# Altium PCB ScreenBoard.PcbDoc (part 2 of 2)
Units mm, origin at the board's own origin, x right, y up, seen from the top; angles counter-clockwise.
Board outline 100 x 71.63 mm, 2 copper layers (Top Layer, Bottom Layer); 43 components, 41 nets, 216 pads, 1776 vias.
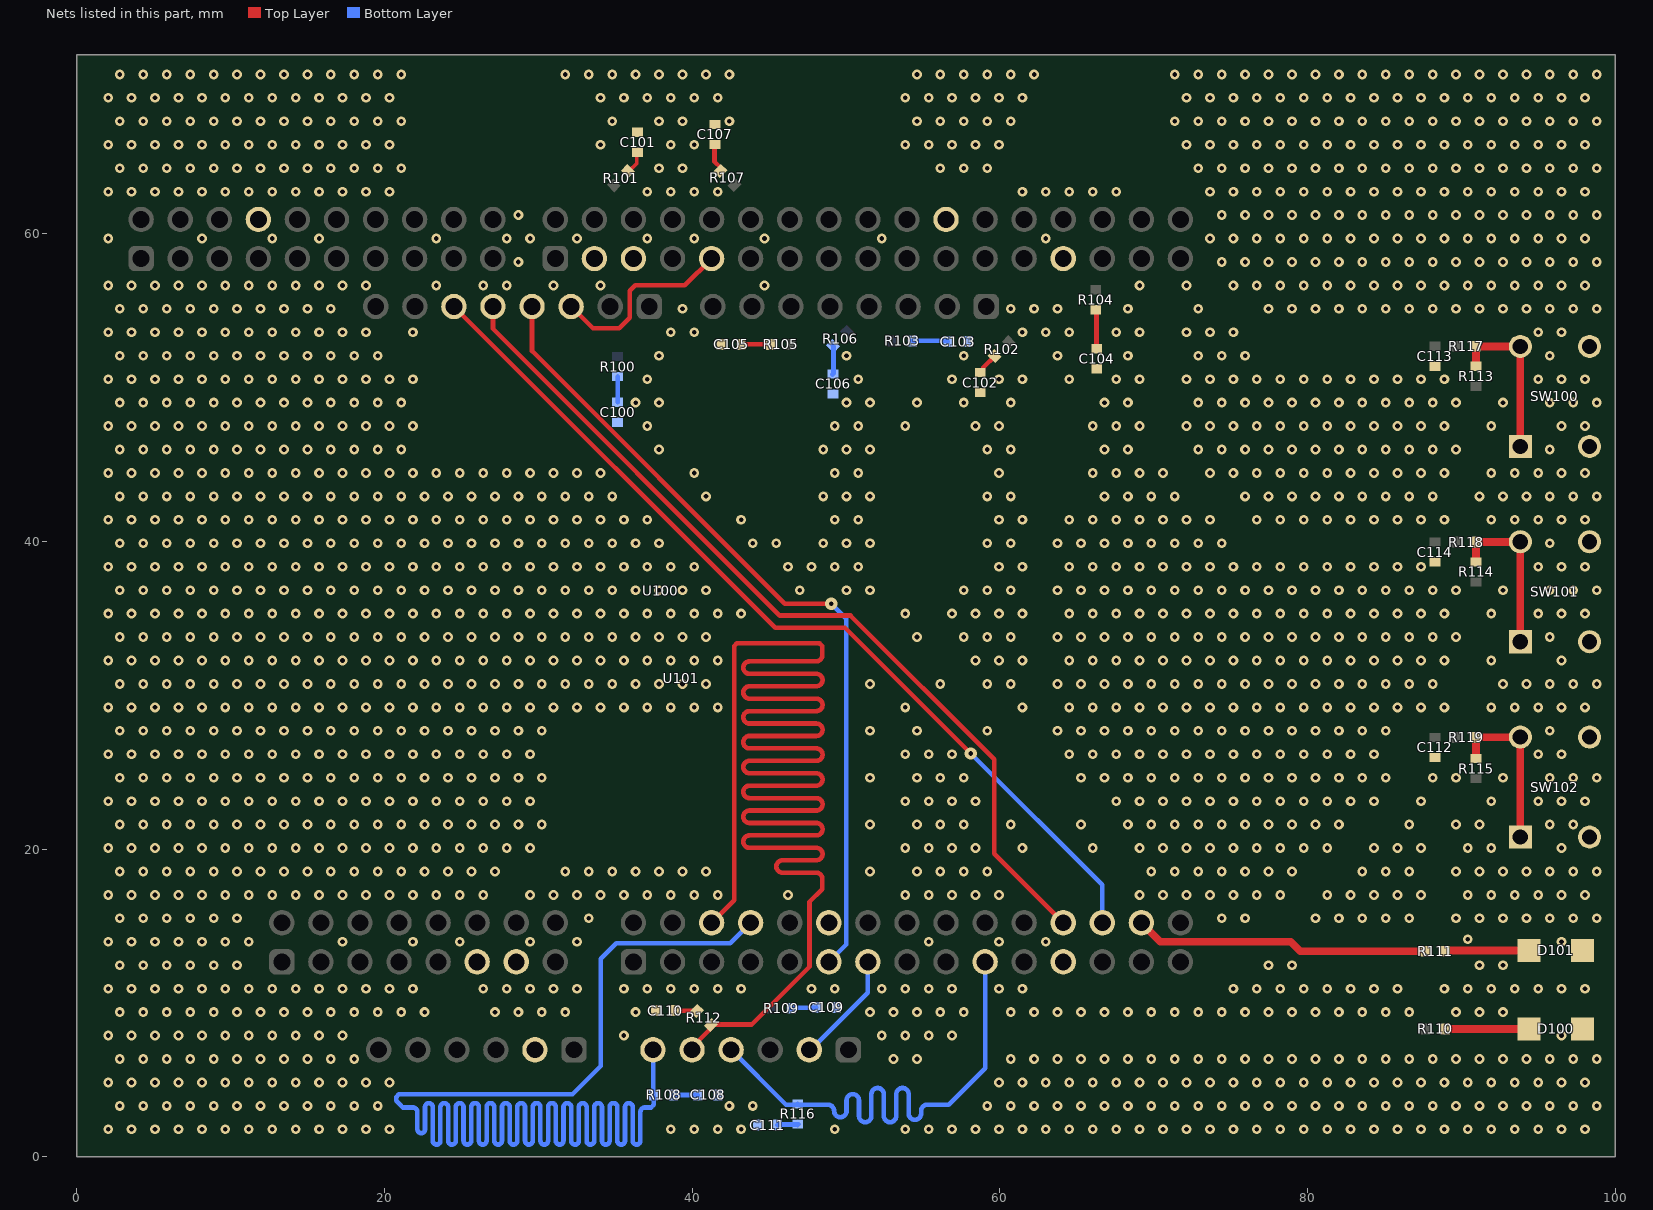
[diagram p2: the nets of this part, all layers, seen from the top]

## Via types
v1: diameter 0.635, hole 0.305, Top Layer to Bottom Layer, tented both sides, 1773 vias
v2: diameter 0.804, hole 0.3, Top Layer to Bottom Layer, tented both sides, 2 vias
v3: diameter 1.3, hole 0.6, Top Layer to Bottom Layer, tented both sides, 1 vias

## Nets (pads, with @x,y where several pads share a name; then routed paths per layer and width w, separated by ;. In a path a pad name is that pad's centre, name@x,y a point inside that pad or via, vN(x,y) a via of type N, cw(c..) or ccw(c..) an arc to the next point about the centre after c; other vN are vias at no path point) (continued)
GND: C100.2 C101.2 C102.2 C103.2 C104.2 C105.2 C106.2 C107.2 C108.2 C109.2 C110.2 C111.2 C112.2 C113.2 C114.2 D100.1 D101.1 SW100.3 SW100.4 SW101.3 SW101.4 SW102.3 SW102.4 U100.11 U100.13 U100.28 U100.39 U100.54 U100.69 U100.71 U100.88 U100.93 U101.8
  other v1: 2.032,1.778 3.556,1.778 5.08,1.778 6.604,1.778 8.128,1.778 9.652,1.778 11.176,1.778 12.7,1.778 14.224,1.778 15.748,1.778 17.272,1.778 18.796,1.778 20.32,1.778 38.608,1.778 40.132,1.778 41.656,1.778 43.18,1.778 49.276,1.778 53.848,1.778 55.372,1.778 56.896,1.778 58.42,1.778 59.944,1.778 61.468,1.778 62.992,1.778 64.516,1.778 66.04,1.778 67.564,1.778 69.088,1.778 70.612,1.778 72.136,1.778 73.66,1.778 75.184,1.778 76.708,1.778 78.232,1.778 79.756,1.778 81.28,1.778 82.804,1.778 84.328,1.778 85.852,1.778 87.376,1.778 88.9,1.778 90.424,1.778 91.948,1.778 93.472,1.778 94.996,1.778 96.52,1.778 98.044,1.778 2.794,3.302 4.318,3.302 5.842,3.302 7.366,3.302 8.89,3.302 10.414,3.302 11.938,3.302 13.462,3.302 14.986,3.302 16.51,3.302 18.034,3.302 19.558,3.302 42.418,3.302 43.942,3.302 59.182,3.302 60.706,3.302 62.23,3.302 63.754,3.302 65.278,3.302 66.802,3.302 68.326,3.302 69.85,3.302 71.374,3.302 72.898,3.302 74.422,3.302 75.946,3.302 77.47,3.302 78.994,3.302 80.518,3.302 82.042,3.302 83.566,3.302 85.09,3.302 86.614,3.302 88.138,3.302 89.662,3.302 91.186,3.302 92.71,3.302 94.234,3.302 95.758,3.302 97.282,3.302 98.806,3.302 2.032,4.826 3.556,4.826 5.08,4.826 6.604,4.826 8.128,4.826 9.652,4.826 11.176,4.826 12.7,4.826 14.224,4.826 15.748,4.826 17.272,4.826 18.796,4.826 20.32,4.826 59.944,4.826 61.468,4.826 62.992,4.826 64.516,4.826 66.04,4.826 67.564,4.826 69.088,4.826 70.612,4.826 72.136,4.826 73.66,4.826 75.184,4.826 76.708,4.826 78.232,4.826 79.756,4.826 81.28,4.826 82.804,4.826 84.328,4.826 85.852,4.826 87.376,4.826 88.9,4.826 90.424,4.826 91.948,4.826 93.472,4.826 94.996,4.826 96.52,4.826 98.044,4.826 2.794,6.35 4.318,6.35 5.842,6.35 7.366,6.35 8.89,6.35 10.414,6.35 11.938,6.35 13.462,6.35 14.986,6.35 16.51,6.35 18.034,6.35 53.086,6.35 54.61,6.35 60.706,6.35 62.23,6.35 63.754,6.35 65.278,6.35 66.802,6.35 68.326,6.35 69.85,6.35 71.374,6.35 72.898,6.35 74.422,6.35 75.946,6.35 77.47,6.35 78.994,6.35 80.518,6.35 82.042,6.35 83.566,6.35 85.09,6.35 86.614,6.35 88.138,6.35 89.662,6.35 91.186,6.35 92.71,6.35 94.234,6.35 95.758,6.35 97.282,6.35 98.806,6.35 2.032,7.874 3.556,7.874 5.08,7.874 6.604,7.874 8.128,7.874 9.652,7.874 11.176,7.874 12.7,7.874 14.224,7.874 15.748,7.874 17.272,7.874 35.56,7.874 52.324,7.874 53.848,7.874 55.372,7.874 56.896,7.874 96.52,7.874 2.794,9.398 4.318,9.398 5.842,9.398 7.366,9.398 8.89,9.398 10.414,9.398 11.938,9.398 13.462,9.398 14.986,9.398 16.51,9.398 18.034,9.398 19.558,9.398 21.082,9.398 22.606,9.398 27.178,9.398 28.702,9.398 30.226,9.398 31.75,9.398 36.322,9.398 51.562,9.398 53.086,9.398 54.61,9.398 56.134,9.398 57.658,9.398 60.706,9.398 62.23,9.398 63.754,9.398 65.278,9.398 66.802,9.398 68.326,9.398 69.85,9.398 71.374,9.398 72.898,9.398 74.422,9.398 75.946,9.398 77.47,9.398 78.994,9.398 80.518,9.398 82.042,9.398 83.566,9.398 85.09,9.398 86.614,9.398 89.662,9.398 91.186,9.398 92.71,9.398 2.032,10.922 3.556,10.922 5.08,10.922 6.604,10.922 8.128,10.922 9.652,10.922 11.176,10.922 12.7,10.922 14.224,10.922 15.748,10.922 17.272,10.922 18.796,10.922 20.32,10.922 21.844,10.922 26.416,10.922 27.94,10.922 29.464,10.922 30.988,10.922 32.512,10.922 35.56,10.922 37.084,10.922 38.608,10.922 40.132,10.922 41.656,10.922 43.18,10.922 47.752,10.922 49.276,10.922 52.324,10.922 53.848,10.922 55.372,10.922 56.896,10.922 59.944,10.922 61.468,10.922 75.184,10.922 76.708,10.922 78.232,10.922 79.756,10.922 81.28,10.922 82.804,10.922 84.328,10.922 85.852,10.922 88.9,10.922 90.424,10.922 91.948,10.922 93.472,10.922 94.996,10.922 96.52,10.922 98.044,10.922 2.794,12.446 4.318,12.446 5.842,12.446 7.366,12.446 8.89,12.446 10.414,12.446 77.47,12.446 78.994,12.446 91.186,12.446 92.71,12.446 2.032,13.97 3.556,13.97 5.08,13.97 6.604,13.97 8.128,13.97 9.652,13.97 11.176,13.97 17.272,13.97 21.844,13.97 24.892,13.97 29.464,13.97 32.512,13.97 55.372,13.97 59.944,13.97 62.992,13.97 96.52,13.97 90.424,14.135 2.794,15.494 4.318,15.494 5.842,15.494 7.366,15.494 8.89,15.494 10.414,15.494 33.274,15.494 74.422,15.494 75.946,15.494 80.518,15.494 82.042,15.494 83.566,15.494 85.09,15.494 86.614,15.494 89.662,15.494 91.186,15.494 92.71,15.494 94.234,15.494 95.758,15.494 97.282,15.494 98.806,15.494 2.032,17.018 3.556,17.018 5.08,17.018 6.604,17.018 8.128,17.018 9.652,17.018 11.176,17.018 12.7,17.018 14.224,17.018 15.748,17.018 17.272,17.018 18.796,17.018 20.32,17.018 21.844,17.018 23.368,17.018 24.892,17.018 26.416,17.018 29.464,17.018 30.988,17.018 32.512,17.018 34.036,17.018 35.56,17.018 37.084,17.018 38.608,17.018 40.132,17.018 41.656,17.018 46.228,17.018 53.848,17.018 55.372,17.018 56.896,17.018 58.42,17.018 59.944,17.018 69.088,17.018 70.612,17.018 72.136,17.018 73.66,17.018 75.184,17.018 76.708,17.018 78.232,17.018 81.28,17.018 82.804,17.018 84.328,17.018 85.852,17.018 87.376,17.018 90.424,17.018 91.948,17.018 93.472,17.018 94.996,17.018 96.52,17.018 98.044,17.018 2.794,18.542 4.318,18.542 5.842,18.542 7.366,18.542 8.89,18.542 10.414,18.542 11.938,18.542 13.462,18.542 14.986,18.542 16.51,18.542 18.034,18.542 19.558,18.542 21.082,18.542 22.606,18.542 24.13,18.542 25.654,18.542 27.178,18.542 31.75,18.542 33.274,18.542 34.798,18.542 36.322,18.542 37.846,18.542 39.37,18.542 40.894,18.542 51.562,18.542 54.61,18.542 56.134,18.542 57.658,18.542 59.182,18.542 69.85,18.542 71.374,18.542 72.898,18.542 74.422,18.542 75.946,18.542 77.47,18.542 78.994,18.542 83.566,18.542 85.09,18.542 86.614,18.542 89.662,18.542 91.186,18.542 92.71,18.542 94.234,18.542 95.758,18.542 97.282,18.542 98.806,18.542 2.032,20.066 3.556,20.066 5.08,20.066 6.604,20.066 8.128,20.066 9.652,20.066 11.176,20.066 12.7,20.066 14.224,20.066 15.748,20.066 17.272,20.066 18.796,20.066 20.32,20.066 21.844,20.066 23.368,20.066 24.892,20.066 26.416,20.066 27.94,20.066 29.464,20.066 53.848,20.066 55.372,20.066 56.896,20.066 58.42,20.066 61.468,20.066 66.04,20.066 69.088,20.066 70.612,20.066 72.136,20.066 73.66,20.066 75.184,20.066 76.708,20.066 78.232,20.066 79.756,20.066 81.28,20.066 84.328,20.066 85.852,20.066 87.376,20.066 90.424,20.066 91.948,20.066 96.52,20.066 2.794,21.59 4.318,21.59 5.842,21.59 7.366,21.59 8.89,21.59 10.414,21.59 11.938,21.59 13.462,21.59 14.986,21.59 16.51,21.59 18.034,21.59 19.558,21.59 21.082,21.59 22.606,21.59 24.13,21.59 25.654,21.59 27.178,21.59 28.702,21.59 30.226,21.59 51.562,21.59 54.61,21.59 56.134,21.59 57.658,21.59 60.706,21.59 65.278,21.59 68.326,21.59 69.85,21.59 71.374,21.59 72.898,21.59 74.422,21.59 75.946,21.59 77.47,21.59 78.994,21.59 80.518,21.59 82.042,21.59 86.614,21.59 89.662,21.59 91.186,21.59 95.758,21.59 97.282,21.59 2.032,23.114 3.556,23.114 5.08,23.114 6.604,23.114 8.128,23.114 9.652,23.114 11.176,23.114 12.7,23.114 14.224,23.114 15.748,23.114 17.272,23.114 18.796,23.114 20.32,23.114 21.844,23.114 23.368,23.114 24.892,23.114 26.416,23.114 27.94,23.114 29.464,23.114 53.848,23.114 55.372,23.114 56.896,23.114 58.42,23.114 67.564,23.114 69.088,23.114 70.612,23.114 72.136,23.114 73.66,23.114 75.184,23.114 76.708,23.114 78.232,23.114 79.756,23.114 81.28,23.114 82.804,23.114 84.328,23.114 87.376,23.114 91.948,23.114 94.996,23.114 96.52,23.114 98.044,23.114 2.794,24.638 4.318,24.638 5.842,24.638 7.366,24.638 8.89,24.638 10.414,24.638 11.938,24.638 13.462,24.638 14.986,24.638 16.51,24.638 18.034,24.638 19.558,24.638 21.082,24.638 22.606,24.638 24.13,24.638 25.654,24.638 27.178,24.638 28.702,24.638 30.226,24.638 51.562,24.638 54.61,24.638 56.134,24.638 57.658,24.638 65.278,24.638 66.802,24.638 68.326,24.638 69.85,24.638 71.374,24.638 72.898,24.638 74.422,24.638 75.946,24.638 77.47,24.638 78.994,24.638 80.518,24.638 82.042,24.638 83.566,24.638 85.09,24.638 88.138,24.638 89.662,24.638 92.71,24.638 95.758,24.638 97.282,24.638 98.806,24.638 2.032,26.162 3.556,26.162 5.08,26.162 6.604,26.162 8.128,26.162 9.652,26.162 11.176,26.162 12.7,26.162 14.224,26.162 15.748,26.162 17.272,26.162 18.796,26.162 20.32,26.162 21.844,26.162 23.368,26.162 24.892,26.162 26.416,26.162 27.94,26.162 29.464,26.162 53.848,26.162 55.372,26.162 56.896,26.162 64.516,26.162 66.04,26.162 67.564,26.162 69.088,26.162 70.612,26.162 72.136,26.162 73.66,26.162 75.184,26.162 76.708,26.162 78.232,26.162 79.756,26.162 81.28,26.162 82.804,26.162 84.328,26.162 94.996,26.162 96.52,26.162 2.794,27.686 4.318,27.686 5.842,27.686 7.366,27.686 8.89,27.686 10.414,27.686 11.938,27.686 13.462,27.686 14.986,27.686 16.51,27.686 18.034,27.686 19.558,27.686 21.082,27.686 22.606,27.686 24.13,27.686 25.654,27.686 27.178,27.686 28.702,27.686 30.226,27.686 51.562,27.686 54.61,27.686 59.182,27.686 63.754,27.686 65.278,27.686 66.802,27.686 68.326,27.686 69.85,27.686 71.374,27.686 72.898,27.686 74.422,27.686 75.946,27.686 77.47,27.686 78.994,27.686 80.518,27.686 82.042,27.686 83.566,27.686 85.09,27.686 95.758,27.686 2.032,29.21 3.556,29.21 5.08,29.21 6.604,29.21 8.128,29.21 9.652,29.21 11.176,29.21 12.7,29.21 14.224,29.21 15.748,29.21 17.272,29.21 18.796,29.21 20.32,29.21 21.844,29.21 23.368,29.21 24.892,29.21 26.416,29.21 27.94,29.21 29.464,29.21 30.988,29.21 32.512,29.21 34.036,29.21 35.56,29.21 37.084,29.21 38.608,29.21 40.132,29.21 41.656,29.21 53.848,29.21 61.468,29.21 64.516,29.21 66.04,29.21 67.564,29.21 69.088,29.21 70.612,29.21 72.136,29.21 73.66,29.21 75.184,29.21 76.708,29.21 78.232,29.21 79.756,29.21 81.28,29.21 82.804,29.21 84.328,29.21 85.852,29.21 87.376,29.21 88.9,29.21 91.948,29.21 93.472,29.21 94.996,29.21 96.52,29.21 98.044,29.21 2.794,30.734 4.318,30.734 5.842,30.734 7.366,30.734 8.89,30.734 10.414,30.734 11.938,30.734 13.462,30.734 14.986,30.734 16.51,30.734 18.034,30.734 19.558,30.734 21.082,30.734 22.606,30.734 24.13,30.734 25.654,30.734 27.178,30.734 28.702,30.734 30.226,30.734 31.75,30.734 33.274,30.734 34.798,30.734 36.322,30.734 37.846,30.734 39.37,30.734 40.894,30.734 51.562,30.734 56.134,30.734 59.182,30.734 60.706,30.734 63.754,30.734 65.278,30.734 66.802,30.734 68.326,30.734 69.85,30.734 71.374,30.734 72.898,30.734 74.422,30.734 75.946,30.734 77.47,30.734 78.994,30.734 80.518,30.734 82.042,30.734 83.566,30.734 85.09,30.734 86.614,30.734 88.138,30.734 92.71,30.734 94.234,30.734 95.758,30.734 97.282,30.734 98.806,30.734 2.032,32.258 3.556,32.258 5.08,32.258 6.604,32.258 8.128,32.258 9.652,32.258 11.176,32.258 12.7,32.258 14.224,32.258 15.748,32.258 17.272,32.258 18.796,32.258 20.32,32.258 21.844,32.258 23.368,32.258 24.892,32.258 26.416,32.258 27.94,32.258 29.464,32.258 30.988,32.258 32.512,32.258 34.036,32.258 35.56,32.258 37.084,32.258 38.608,32.258 40.132,32.258 41.656,32.258 58.42,32.258 59.944,32.258 61.468,32.258 64.516,32.258 66.04,32.258 67.564,32.258 69.088,32.258 70.612,32.258 72.136,32.258 73.66,32.258 75.184,32.258 76.708,32.258 78.232,32.258 79.756,32.258 81.28,32.258 82.804,32.258 84.328,32.258 85.852,32.258 87.376,32.258 88.9,32.258 91.948,32.258 96.52,32.258 2.794,33.782 4.318,33.782 5.842,33.782 7.366,33.782 8.89,33.782 10.414,33.782 11.938,33.782 13.462,33.782 14.986,33.782 16.51,33.782 18.034,33.782 19.558,33.782 21.082,33.782 22.606,33.782 24.13,33.782 25.654,33.782 27.178,33.782 28.702,33.782 30.226,33.782 31.75,33.782 33.274,33.782 34.798,33.782 36.322,33.782 37.846,33.782 39.37,33.782 40.894,33.782 54.61,33.782 57.658,33.782 59.182,33.782 60.706,33.782 63.754,33.782 65.278,33.782 66.802,33.782 68.326,33.782 69.85,33.782 71.374,33.782 72.898,33.782 74.422,33.782 75.946,33.782 77.47,33.782 78.994,33.782 80.518,33.782 82.042,33.782 83.566,33.782 85.09,33.782 86.614,33.782 88.138,33.782 89.662,33.782 95.758,33.782 2.032,35.306 3.556,35.306 5.08,35.306 6.604,35.306 8.128,35.306 9.652,35.306 11.176,35.306 12.7,35.306 14.224,35.306 15.748,35.306 17.272,35.306 18.796,35.306 20.32,35.306 21.844,35.306 23.368,35.306 24.892,35.306 26.416,35.306 27.94,35.306 29.464,35.306 30.988,35.306 32.512,35.306 34.036,35.306 35.56,35.306 37.084,35.306 38.608,35.306 40.132,35.306 41.656,35.306 43.18,35.306 53.848,35.306 56.896,35.306 58.42,35.306 59.944,35.306 61.468,35.306 64.516,35.306 66.04,35.306 67.564,35.306 69.088,35.306 70.612,35.306 72.136,35.306 73.66,35.306 75.184,35.306 76.708,35.306 78.232,35.306 79.756,35.306 81.28,35.306 82.804,35.306 84.328,35.306 85.852,35.306 87.376,35.306 88.9,35.306 91.948,35.306 94.996,35.306 96.52,35.306 98.044,35.306 2.794,36.83 4.318,36.83 5.842,36.83 7.366,36.83 8.89,36.83 10.414,36.83 11.938,36.83 13.462,36.83 14.986,36.83 16.51,36.83 18.034,36.83 19.558,36.83 21.082,36.83 22.606,36.83 24.13,36.83 25.654,36.83 27.178,36.83 28.702,36.83 30.226,36.83 31.75,36.83 33.274,36.83 34.798,36.83 36.322,36.83 37.846,36.83 39.37,36.83 40.894,36.83 46.99,36.83 50.038,36.83 51.562,36.83 57.658,36.83 59.182,36.83 60.706,36.83 63.754,36.83 65.278,36.83 66.802,36.83 68.326,36.83 69.85,36.83 71.374,36.83 72.898,36.83 74.422,36.83 75.946,36.83 77.47,36.83 78.994,36.83 80.518,36.83 82.042,36.83 83.566,36.83 85.09,36.83 86.614,36.83 88.138,36.83 89.662,36.83 92.71,36.83 95.758,36.83 97.282,36.83 98.806,36.83 2.032,38.354 3.556,38.354 5.08,38.354 6.604,38.354 8.128,38.354 9.652,38.354 11.176,38.354 12.7,38.354 14.224,38.354 15.748,38.354 17.272,38.354 18.796,38.354 20.32,38.354 21.844,38.354 23.368,38.354 24.892,38.354 26.416,38.354 27.94,38.354 29.464,38.354 30.988,38.354 32.512,38.354 34.036,38.354 35.56,38.354 37.084,38.354 38.608,38.354 40.132,38.354 46.228,38.354 47.752,38.354 49.276,38.354 50.8,38.354 59.944,38.354 61.468,38.354 64.516,38.354 66.04,38.354 67.564,38.354 69.088,38.354 70.612,38.354 72.136,38.354 73.66,38.354 75.184,38.354 76.708,38.354 78.232,38.354 79.756,38.354 81.28,38.354 82.804,38.354 84.328,38.354 85.852,38.354 87.376,38.354 94.996,38.354 96.52,38.354 98.044,38.354 2.794,39.878 4.318,39.878 5.842,39.878 7.366,39.878 8.89,39.878 10.414,39.878 11.938,39.878 13.462,39.878 14.986,39.878 16.51,39.878 18.034,39.878 19.558,39.878 21.082,39.878 22.606,39.878 24.13,39.878 25.654,39.878 27.178,39.878 28.702,39.878 30.226,39.878 31.75,39.878 33.274,39.878 34.798,39.878 36.322,39.878 37.846,39.878 43.942,39.878 45.466,39.878 48.514,39.878 50.038,39.878 51.562,39.878 59.182,39.878 60.706,39.878 63.754,39.878 65.278,39.878 66.802,39.878 68.326,39.878 69.85,39.878 71.374,39.878 72.898,39.878 74.422,39.878 95.758,39.878 2.032,41.402 3.556,41.402 5.08,41.402 6.604,41.402 8.128,41.402 9.652,41.402 11.176,41.402 12.7,41.402 14.224,41.402 15.748,41.402 17.272,41.402 18.796,41.402 20.32,41.402 21.844,41.402 23.368,41.402 24.892,41.402 26.416,41.402 27.94,41.402 29.464,41.402 30.988,41.402 32.512,41.402 34.036,41.402 35.56,41.402 37.084,41.402 43.18,41.402 49.276,41.402 50.8,41.402 59.944,41.402 61.468,41.402 64.516,41.402 66.04,41.402 67.564,41.402 69.088,41.402 70.612,41.402 72.136,41.402 73.66,41.402 76.708,41.402 78.232,41.402 79.756,41.402 81.28,41.402 82.804,41.402 84.328,41.402 85.852,41.402 87.376,41.402 88.9,41.402 91.948,41.402 93.472,41.402 94.996,41.402 96.52,41.402 98.044,41.402 2.794,42.926 4.318,42.926 5.842,42.926 7.366,42.926 8.89,42.926 10.414,42.926 11.938,42.926 13.462,42.926 14.986,42.926 16.51,42.926 18.034,42.926 19.558,42.926 21.082,42.926 22.606,42.926 24.13,42.926 25.654,42.926 27.178,42.926 28.702,42.926 30.226,42.926 31.75,42.926 33.274,42.926 34.798,42.926 40.894,42.926 48.514,42.926 50.038,42.926 51.562,42.926 59.182,42.926 60.706,42.926 66.802,42.926 68.326,42.926 69.85,42.926 71.374,42.926 75.946,42.926 77.47,42.926 78.994,42.926 80.518,42.926 82.042,42.926 83.566,42.926 85.09,42.926 86.614,42.926 88.138,42.926 91.186,42.926 92.71,42.926 94.234,42.926 95.758,42.926 97.282,42.926 98.806,42.926 2.032,44.45 3.556,44.45 5.08,44.45 6.604,44.45 8.128,44.45 9.652,44.45 11.176,44.45 12.7,44.45 14.224,44.45 15.748,44.45 17.272,44.45 18.796,44.45 20.32,44.45 21.844,44.45 23.368,44.45 24.892,44.45 26.416,44.45 27.94,44.45 29.464,44.45 30.988,44.45 32.512,44.45 34.036,44.45 40.132,44.45 49.276,44.45 50.8,44.45 59.944,44.45 66.04,44.45 67.564,44.45 69.088,44.45 70.612,44.45 73.66,44.45 75.184,44.45 76.708,44.45 78.232,44.45 79.756,44.45 81.28,44.45 82.804,44.45 84.328,44.45 85.852,44.45 87.376,44.45 88.9,44.45 91.948,44.45 93.472,44.45 94.996,44.45 96.52,44.45 98.044,44.45 2.794,45.974 4.318,45.974 5.842,45.974 7.366,45.974 8.89,45.974 10.414,45.974 11.938,45.974 13.462,45.974 14.986,45.974 16.51,45.974 18.034,45.974 19.558,45.974 21.082,45.974 37.846,45.974 48.514,45.974 50.038,45.974 51.562,45.974 59.182,45.974 60.706,45.974 66.802,45.974 68.326,45.974 72.898,45.974 74.422,45.974 75.946,45.974 77.47,45.974 78.994,45.974 80.518,45.974 82.042,45.974 83.566,45.974 85.09,45.974 86.614,45.974 88.138,45.974 89.662,45.974 95.758,45.974 2.032,47.498 3.556,47.498 5.08,47.498 6.604,47.498 8.128,47.498 9.652,47.498 11.176,47.498 12.7,47.498 14.224,47.498 15.748,47.498 17.272,47.498 18.796,47.498 20.32,47.498 21.844,47.498 37.084,47.498 49.276,47.498 50.8,47.498 53.848,47.498 58.42,47.498 59.944,47.498 66.04,47.498 67.564,47.498 69.088,47.498 72.136,47.498 73.66,47.498 75.184,47.498 76.708,47.498 78.232,47.498 79.756,47.498 81.28,47.498 82.804,47.498 84.328,47.498 85.852,47.498 87.376,47.498 88.9,47.498 91.948,47.498 96.52,47.498 98.044,47.498 2.794,49.022 4.318,49.022 5.842,49.022 7.366,49.022 8.89,49.022 10.414,49.022 11.938,49.022 13.462,49.022 14.986,49.022 16.51,49.022 18.034,49.022 19.558,49.022 21.082,49.022 36.322,49.022 37.846,49.022 50.038,49.022 51.562,49.022 54.61,49.022 57.658,49.022 60.706,49.022 66.802,49.022 68.326,49.022 72.898,49.022 74.422,49.022 75.946,49.022 77.47,49.022 78.994,49.022 80.518,49.022 82.042,49.022 83.566,49.022 85.09,49.022 86.614,49.022 88.138,49.022 89.662,49.022 92.71,49.022 95.758,49.022 97.282,49.022 98.806,49.022 2.032,50.546 3.556,50.546 5.08,50.546 6.604,50.546 8.128,50.546 9.652,50.546 11.176,50.546 12.7,50.546 14.224,50.546 15.748,50.546 17.272,50.546 18.796,50.546 20.32,50.546 21.844,50.546 37.084,50.546 50.8,50.546 56.896,50.546 59.944,50.546 61.468,50.546 64.516,50.546 67.564,50.546 69.088,50.546 72.136,50.546 73.66,50.546 75.184,50.546 76.708,50.546 78.232,50.546 79.756,50.546 81.28,50.546 82.804,50.546 84.328,50.546 85.852,50.546 87.376,50.546 88.9,50.546 94.996,50.546 96.52,50.546 98.044,50.546 2.794,52.07 4.318,52.07 5.842,52.07 7.366,52.07 8.89,52.07 10.414,52.07 11.938,52.07 13.462,52.07 14.986,52.07 16.51,52.07 18.034,52.07 19.558,52.07 37.846,52.07 50.038,52.07 57.658,52.07 63.754,52.07 68.326,52.07 72.898,52.07 74.422,52.07 75.946,52.07 95.758,52.07 2.032,53.594 3.556,53.594 5.08,53.594 6.604,53.594 8.128,53.594 9.652,53.594 11.176,53.594 12.7,53.594 14.224,53.594 15.748,53.594 17.272,53.594 18.796,53.594 21.844,53.594 38.608,53.594 40.132,53.594 61.468,53.594 62.992,53.594 64.516,53.594 67.564,53.594 69.088,53.594 72.136,53.594 73.66,53.594 75.184,53.594 94.996,53.594 96.52,53.594 2.794,55.118 4.318,55.118 5.842,55.118 7.366,55.118 8.89,55.118 10.414,55.118 11.938,55.118 13.462,55.118 14.986,55.118 16.51,55.118 39.37,55.118 60.706,55.118 62.23,55.118 63.754,55.118 68.326,55.118 72.898,55.118 77.47,55.118 78.994,55.118 80.518,55.118 82.042,55.118 83.566,55.118 85.09,55.118 86.614,55.118 88.138,55.118 89.662,55.118 91.186,55.118 92.71,55.118 94.234,55.118 95.758,55.118 97.282,55.118 98.806,55.118 2.032,56.642 3.556,56.642 5.08,56.642 6.604,56.642 8.128,56.642 9.652,56.642 11.176,56.642 12.7,56.642 14.224,56.642 15.748,56.642 17.272,56.642 18.796,56.642 23.368,56.642 26.416,56.642 27.94,56.642 30.988,56.642 34.036,56.642 44.704,56.642 69.088,56.642 72.136,56.642 75.184,56.642 76.708,56.642 78.232,56.642 79.756,56.642 81.28,56.642 82.804,56.642 84.328,56.642 85.852,56.642 87.376,56.642 88.9,56.642 90.424,56.642 91.948,56.642 93.472,56.642 94.996,56.642 96.52,56.642 98.044,56.642 28.702,58.166 74.422,58.166 75.946,58.166 77.47,58.166 78.994,58.166 80.518,58.166 82.042,58.166 83.566,58.166 85.09,58.166 86.614,58.166 88.138,58.166 89.662,58.166 91.186,58.166 92.71,58.166 94.234,58.166 95.758,58.166 97.282,58.166 98.806,58.166 2.032,59.69 8.128,59.69 12.7,59.69 15.748,59.69 23.368,59.69 27.94,59.69 29.464,59.69 32.512,59.69 37.084,59.69 40.132,59.69 44.704,59.69 52.324,59.69 62.992,59.69 73.66,59.69 75.184,59.69 76.708,59.69 78.232,59.69 79.756,59.69 81.28,59.69 82.804,59.69 84.328,59.69 85.852,59.69 87.376,59.69 88.9,59.69 90.424,59.69 91.948,59.69 93.472,59.69 94.996,59.69 96.52,59.69 98.044,59.69 28.702,61.214 74.422,61.214 75.946,61.214 77.47,61.214 78.994,61.214 80.518,61.214 82.042,61.214 83.566,61.214 85.09,61.214 86.614,61.214 88.138,61.214 89.662,61.214 91.186,61.214 92.71,61.214 94.234,61.214 95.758,61.214 97.282,61.214 98.806,61.214 2.032,62.738 3.556,62.738 5.08,62.738 6.604,62.738 8.128,62.738 9.652,62.738 11.176,62.738 12.7,62.738 14.224,62.738 15.748,62.738 17.272,62.738 18.796,62.738 20.32,62.738 37.084,62.738 38.608,62.738 40.132,62.738 41.656,62.738 61.468,62.738 62.992,62.738 64.516,62.738 66.04,62.738 67.564,62.738 73.66,62.738 75.184,62.738 76.708,62.738 78.232,62.738 79.756,62.738 81.28,62.738 82.804,62.738 84.328,62.738 85.852,62.738 87.376,62.738 88.9,62.738 90.424,62.738 91.948,62.738 93.472,62.738 94.996,62.738 96.52,62.738 98.044,62.738 2.794,64.262 4.318,64.262 5.842,64.262 7.366,64.262 8.89,64.262 10.414,64.262 11.938,64.262 13.462,64.262 14.986,64.262 16.51,64.262 18.034,64.262 19.558,64.262 21.082,64.262 37.846,64.262 39.37,64.262 56.134,64.262 57.658,64.262 59.182,64.262 72.898,64.262 74.422,64.262 75.946,64.262 77.47,64.262 78.994,64.262 80.518,64.262 82.042,64.262 83.566,64.262 85.09,64.262 86.614,64.262 88.138,64.262 89.662,64.262 91.186,64.262 92.71,64.262 94.234,64.262 95.758,64.262 97.282,64.262 98.806,64.262 2.032,65.786 3.556,65.786 5.08,65.786 6.604,65.786 8.128,65.786 9.652,65.786 11.176,65.786 12.7,65.786 14.224,65.786 15.748,65.786 17.272,65.786 18.796,65.786 20.32,65.786 34.036,65.786 38.608,65.786 40.132,65.786 53.848,65.786 55.372,65.786 56.896,65.786 58.42,65.786 59.944,65.786 72.136,65.786 73.66,65.786 75.184,65.786 76.708,65.786 78.232,65.786 79.756,65.786 81.28,65.786 82.804,65.786 84.328,65.786 85.852,65.786 87.376,65.786 88.9,65.786 90.424,65.786 91.948,65.786 93.472,65.786 94.996,65.786 96.52,65.786 98.044,65.786 2.794,67.31 4.318,67.31 5.842,67.31 7.366,67.31 8.89,67.31 10.414,67.31 11.938,67.31 13.462,67.31 14.986,67.31 16.51,67.31 18.034,67.31 19.558,67.31 21.082,67.31 34.798,67.31 37.846,67.31 39.37,67.31 42.418,67.31 54.61,67.31 56.134,67.31 57.658,67.31 59.182,67.31 60.706,67.31 71.374,67.31 72.898,67.31 74.422,67.31 75.946,67.31 77.47,67.31 78.994,67.31 80.518,67.31 82.042,67.31 83.566,67.31 85.09,67.31 86.614,67.31 88.138,67.31 89.662,67.31 91.186,67.31 92.71,67.31 94.234,67.31 95.758,67.31 97.282,67.31 98.806,67.31 2.032,68.834 3.556,68.834 5.08,68.834 6.604,68.834 8.128,68.834 9.652,68.834 11.176,68.834 12.7,68.834 14.224,68.834 15.748,68.834 17.272,68.834 18.796,68.834 20.32,68.834 34.036,68.834 35.56,68.834 37.084,68.834 38.608,68.834 40.132,68.834 41.656,68.834 53.848,68.834 55.372,68.834 56.896,68.834 58.42,68.834 59.944,68.834 61.468,68.834 72.136,68.834 73.66,68.834 75.184,68.834 76.708,68.834 78.232,68.834 79.756,68.834 81.28,68.834 82.804,68.834 84.328,68.834 85.852,68.834 87.376,68.834 88.9,68.834 90.424,68.834 91.948,68.834 93.472,68.834 94.996,68.834 96.52,68.834 98.044,68.834 2.794,70.358 4.318,70.358 5.842,70.358 7.366,70.358 8.89,70.358 10.414,70.358 11.938,70.358 13.462,70.358 14.986,70.358 16.51,70.358 18.034,70.358 19.558,70.358 21.082,70.358 31.75,70.358 33.274,70.358 34.798,70.358 36.322,70.358 37.846,70.358 39.37,70.358 40.894,70.358 42.418,70.358 54.61,70.358 56.134,70.358 57.658,70.358 59.182,70.358 60.706,70.358 62.23,70.358 71.374,70.358 72.898,70.358 74.422,70.358 75.946,70.358 77.47,70.358 78.994,70.358 80.518,70.358 82.042,70.358 83.566,70.358 85.09,70.358 86.614,70.358 88.138,70.358 89.662,70.358 91.186,70.358 92.71,70.358 94.234,70.358 95.758,70.358 97.282,70.358 98.806,70.358
NetC100_1: C100.1 R100.1 | length 1.7
  Bottom Layer w0.3: C100.1@35.154,49.047 R100.1@35.154,50.719
NetC101_1: C101.1 R101.2 | length 1.5
  Top Layer w0.254: R101.2@35.821,64.069 35.9,64.069 36.398,64.567 36.398,65.253 C101.1@36.449,65.303
NetC102_1: C102.1 R102.1 | length 1.5
  Top Layer w0.3: C102.1@58.725,50.978 58.775,50.978 58.925,51.128 58.925,51.305 R102.1@59.66,52.04
NetC103_1: C103.1 R103.2 | length 2.3
  Bottom Layer w0.3: R103.2@54.31,53.035 56.571,53.035 C103.1@56.616,52.99
NetC104_1: C104.1 R104.1 | length 2.6
  Top Layer w0.3: R104.1@66.243,55.063 66.281,55.025 66.281,52.54 C104.1@66.294,52.527
NetC105_1: C105.1 R105.2 | length 1.9
  Top Layer w0.3: C105.1@43.18,52.807 R105.2@45.11,52.807
NetC106_1: C106.1 R106.1 | length 1.9
  Bottom Layer w0.3: C106.1@49.124,50.851 49.187,50.915 49.187,52.673 R106.1@49.152,52.708
NetC107_1: C107.1 R107.1 | length 1.9
  Top Layer w0.3: C107.1@41.478,65.807 41.453,65.781 41.453,64.694 41.839,64.308 41.839,64.096 R107.1@41.83,64.086
NetC108_1: C108.1 R108.2 | length 1.6
  Bottom Layer w0.3: R108.2@38.79,4.013 C108.1@40.356,4.013
NetC109_1: C109.1 R109.1 | length 1.7
  Bottom Layer w0.3: R109.1@46.436,9.652 46.461,9.677 48.052,9.677 C109.1@48.078,9.703
NetC110_1: C110.1 R112.2 | length 1.4
  Top Layer w0.3: C110.1@38.933,9.479 40.022,9.479 40.057,9.444 40.27,9.444 R112.2@40.305,9.479
NetC111_1: C111.1 R116.1 | length 1.4
  Bottom Layer w0.3: C111.1@45.542,2.057 45.578,2.093 46.827,2.093 46.863,2.057 R116.1@46.914,2.108
NetD100_2: D100.2 R110.1 | length 5.4
  Top Layer w0.508: R110.1@88.95,8.306 D100.2@94.389,8.306
NetD101_2: D101.2 R111.1 | length 5.5
  Top Layer w0.508: R111.1@88.951,13.36 88.951,13.365 88.997,13.411 D101.2@94.389,13.411
NetR113_1: R113.1 R117.1 SW100.1 SW100.2 | length 10.7
  Top Layer w0.508: R113.1@90.957,51.384 90.96,51.386 90.96,52.677 R117.1@90.962,52.68 90.965,52.677 93.835,52.677 SW100.2@93.838,52.674 SW100.1@93.838,46.174
NetR114_1: R114.1 R118.1 SW101.1 SW101.2 | length 10.7
  Top Layer w0.508: R114.1@90.957,38.663 90.96,38.666 90.96,39.952 R118.1@90.962,39.954 90.974,39.966 93.826,39.966 SW101.2@93.838,39.978 SW101.1@93.838,33.478
NetR115_1: R115.1 R119.1 SW102.1 SW102.2 | length 10.8
  Top Layer w0.508: R115.1@90.957,25.883 R119.1@90.957,27.254 R119.1@90.969,27.266 ; R119.1@90.969,27.216 R119.1@90.969,27.266 ; SW102.1@93.838,20.778 SW102.2@93.838,27.278 93.826,27.266 R119.1@90.969,27.266
RD: R108.1 U100.24 U101.6 | length 125
  Bottom Layer w0.3: U101.6@37.45,6.95 37.47,6.93 37.47,4.033 R108.1@37.49,4.013 37.497,4.007 37.497,3.376 37.321,3.2 37.084,3.2 36.934,3.2 ccw(c36.934,2.9) 36.634,2.9 36.634,1.038 cw(c36.384,1.038) 36.134,1.038 36.134,3.232 ccw(c35.884,3.232) 35.634,3.232 35.634,1.038 cw(c35.384,1.038) 35.134,1.038 35.134,3.232 ccw(c34.884,3.232) 34.634,3.232 34.634,1.038 cw(c34.384,1.038) 34.134,1.038 34.134,3.232 ccw(c33.884,3.232) 33.634,3.232 33.634,1.038 cw(c33.384,1.038) 33.134,1.038 33.134,3.232 ccw(c32.884,3.232) 32.634,3.232 32.634,1.038 cw(c32.384,1.038) 32.134,1.038 32.134,3.232 ccw(c31.884,3.232) 31.634,3.232 31.634,1.038 cw(c31.384,1.038) 31.134,1.038 31.134,3.232 ccw(c30.884,3.232) 30.634,3.232 30.634,1.038 cw(c30.384,1.038) 30.134,1.038 30.134,3.232 ccw(c29.884,3.232) 29.634,3.232 29.634,1.038 cw(c29.384,1.038) 29.134,1.038 29.134,3.232 ccw(c28.884,3.232) 28.634,3.232 28.634,1.038 cw(c28.384,1.038) 28.134,1.038 28.134,3.232 ccw(c27.884,3.232) 27.634,3.232 27.634,1.038 cw(c27.384,1.038) 27.134,1.038 27.134,3.232 ccw(c26.884,3.232) 26.634,3.232 26.634,1.038 cw(c26.384,1.038) 26.134,1.038 26.134,3.232 ccw(c25.884,3.232) 25.634,3.232 25.634,1.038 cw(c25.384,1.038) 25.134,1.038 25.134,3.232 ccw(c24.884,3.232) 24.634,3.232 24.634,1.038 cw(c24.384,1.038) 24.134,1.038 24.134,3.232 ccw(c23.884,3.232) 23.634,3.232 23.634,1.038 cw(c23.384,1.038) 23.134,1.038 23.134,3.232 ccw(c22.884,3.232) 22.634,3.232 22.634,1.782 cw(c22.384,1.782) 22.134,1.782 22.134,2.9 ccw(c21.834,2.9) 21.834,3.2 21.184,3.2 20.981,3.403 20.755,3.629 20.755,3.877 20.931,4.053 32.221,4.053 34.061,5.893 34.061,12.878 35.052,13.868 42.462,13.868 U100.24@43.802,15.208
RS: R116.2 U100.35 U101.4 | length 37
  Bottom Layer w0.3: U101.4@42.53,6.95 46.102,3.378 46.812,3.378 R116.2@46.863,3.429 46.914,3.378 48.153,3.378 48.824,3.378 cw(c48.824,2.974) 49.228,2.974 ccw(c49.632,2.974) 50.036,2.974 50.036,3.664 cw(c50.44,3.664) 50.844,3.664 50.844,2.646 ccw(c51.248,2.646) 51.652,2.646 51.652,4.059 cw(c52.056,4.059) 52.46,4.059 52.46,2.646 ccw(c52.864,2.646) 53.268,2.646 53.268,4.059 cw(c53.672,4.059) 54.076,4.059 54.076,2.802 ccw(c54.48,2.802) 54.884,2.802 54.884,2.974 cw(c55.288,2.974) 55.288,3.378 55.438,3.378 56.667,3.378 59.042,5.753 U100.35@59.042,12.668
RST: U100.29 U101.2 | length 7.4
  Bottom Layer w0.3: U101.2@47.61,6.95 47.702,6.95 51.422,10.67 U100.29@51.422,12.668
SCREEN_LED: R111.2 U100.44 | length 19.2
  Top Layer w0.508: U100.44@69.202,15.208 70.433,13.977 78.911,13.977 79.527,13.36 R111.2@87.651,13.36
SD_DI: U100.27 U101.24 | length 53.3
  Top Layer w0.3: U101.24@29.59,55.27 29.59,52.376 46.025,35.941 v2(49.047,35.941)
  Bottom Layer w0.3: U100.27@48.882,12.668 50.009,13.795 50.009,34.98 v2(49.047,35.941)
SD_DO: U100.40 U101.25 | length 58.1
  Top Layer w0.3: U101.25@27.05,55.27 27.05,53.824 45.695,35.179 50.292,35.179 59.639,25.831 59.639,19.691 U100.40@64.122,15.208
SD_SCK: U100.42 U101.26 | length 60.2
  Top Layer w0.3: U101.26@24.51,55.27 45.388,34.392 49.936,34.392 v2(58.115,26.213)
  Bottom Layer w0.3: v2(58.115,26.213) 66.662,17.666 U100.42@66.662,15.208
SD_SS: U100.75 U101.23 | length 12.6
  Top Layer w0.3: U101.23@32.13,55.27 33.552,53.848 35.257,53.848 35.951,54.542 35.951,56.297 36.297,56.642 39.516,56.642 U100.75@41.262,58.388
WR: R112.1 U100.22 U101.5 | length 138
  Top Layer w0.3: U101.5@39.99,6.95 39.99,7.113 41.224,8.348 R112.1@41.224,8.56 41.26,8.595 43.863,8.595 47.625,12.357 47.625,15.996 47.625,16.561 48.463,17.399 48.463,18.059 ccw(c48.059,18.059) 48.059,18.463 45.875,18.463 cw(c45.875,18.867) 45.875,19.271 48.073,19.271 ccw(c48.073,19.675) 48.073,20.079 43.727,20.079 cw(c43.727,20.483) 43.727,20.887 48.073,20.887 ccw(c48.073,21.291) 48.073,21.695 43.727,21.695 cw(c43.727,22.099) 43.727,22.503 48.073,22.503 ccw(c48.073,22.907) 48.073,23.311 43.727,23.311 cw(c43.727,23.715) 43.727,24.119 48.073,24.119 ccw(c48.073,24.523) 48.073,24.927 43.727,24.927 cw(c43.727,25.331) 43.727,25.735 48.073,25.735 ccw(c48.073,26.139) 48.073,26.543 43.727,26.543 cw(c43.727,26.947) 43.727,27.351 48.073,27.351 ccw(c48.073,27.755) 48.073,28.159 43.727,28.159 cw(c43.727,28.563) 43.727,28.967 48.073,28.967 ccw(c48.073,29.371) 48.073,29.775 43.727,29.775 cw(c43.727,30.179) 43.727,30.583 48.073,30.583 ccw(c48.073,30.987) 48.073,31.391 43.727,31.391 cw(c43.727,31.795) 43.727,32.199 48.059,32.199 ccw(c48.059,32.603) 48.463,32.603 48.463,33.2 48.304,33.359 48.287,33.376 42.899,33.376 42.723,33.2 42.723,16.669 U100.22@41.262,15.208
pads on no net: U100.1 U100.2 U100.3 U100.4 U100.5 U100.6 U100.7 U100.8 U100.10 U100.12 U100.15 U100.16 U100.17 U100.18 U100.19 U100.20 U100.21 U100.23 U100.25 U100.26 U100.30 U100.32 U100.33 U100.34 U100.36 U100.38 U100.45 U100.46 U100.47 U100.48 U100.49 U100.50 U100.51 U100.52 U100.53 U100.55 U100.56 U100.57 U100.58 U100.59 U100.60 U100.61 U100.63 U100.65 U100.66 U100.67 U100.68 U100.70 U100.72 U100.73 U100.74 U100.76 U100.77 U100.78 U100.79 U100.80 U100.81 U100.82 U100.83 U100.85 U100.87 U100.89 U100.91 U100.92 U100.94 U100.95 U100.96 U100.97 U100.100 U101.1 U101.7 U101.9 U101.11 U101.12 U101.13 U101.14 U101.27 U101.28

## Polygon pours and split planes (outlines as drawn)
GND on Top Layer "GND_L01_P000" (solid, remove dead copper, pour order 0): -0.284,-0.08 -0.284,71.548 99.715,71.548 99.715,-0.08
GND on Bottom Layer "GND_L02_P001" (solid, remove dead copper, pour order 1): 0,0 0,71.628 100,71.628 100,0

## Keep-outs
Keep-Out Layer:
  the board outline again, w0.127

## Silkscreen, mask and mechanical layers (free items; w line width, h text height)
Top Overlay:
  text "Simonas Riauka, / Arnas Piaulokas, / Aurimas Junevičius / EEI-0/3, 2023" at 4.039,63.703 h1.02
  text "UP" at 95.174,43.383 h1.02
  text "OK" at 95.402,30.607 h1.02
  text "DOWN" at 94.158,17.755 h1.02
  text "ON" at 94.742,10.135 h1.02
  text "PWR" at 94.005,4.978 h1.02

## Text inside footprints (layer, text, board x,y; h text height)
U100: Top Overlay "2" at 1.473,60.554 h1.02; Top Overlay "1" at 1.829,57.861 h1.02; Top Overlay "20" at 28.55,65.126 h1.02 r90; Top Overlay "19" at 28.55,62.814 h1.02 r90; Top Overlay "2" at 36.522,17.208 h1.02 r90; Top Overlay "1" at 36.622,10.108 h1.02 r90; Top Overlay "30" at 72.314,17.17 h1.02 r90; Top Overlay "29" at 72.322,9.108 h1.02 r90; Top Overlay "15" at 32.487,9.093 h1.02 r90; Top Overlay "16" at 34.138,14.656 h1.02 r90; Top Overlay "1" at 13.722,10.308 h1.02 r90; Top Overlay "2" at 13.716,17.018 h1.02 r90; Top Overlay "2" at 31.471,65.253 h1.02 r90; Top Overlay "1" at 31.471,62.89 h1.02 r90; Top Overlay "72" at 73.99,60.554 h1.02; Top Overlay "71" at 73.939,57.861 h1.02